# EAGLE board mixer2_old (EAGLE 7.3.0)
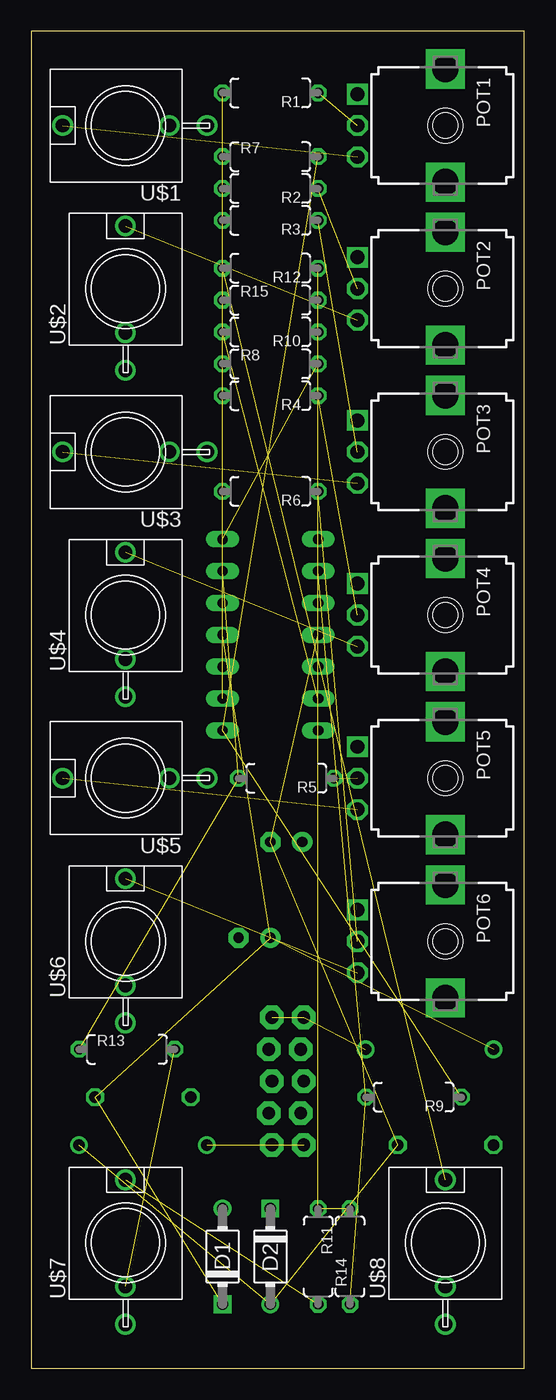
[diagram p0: board, top side]
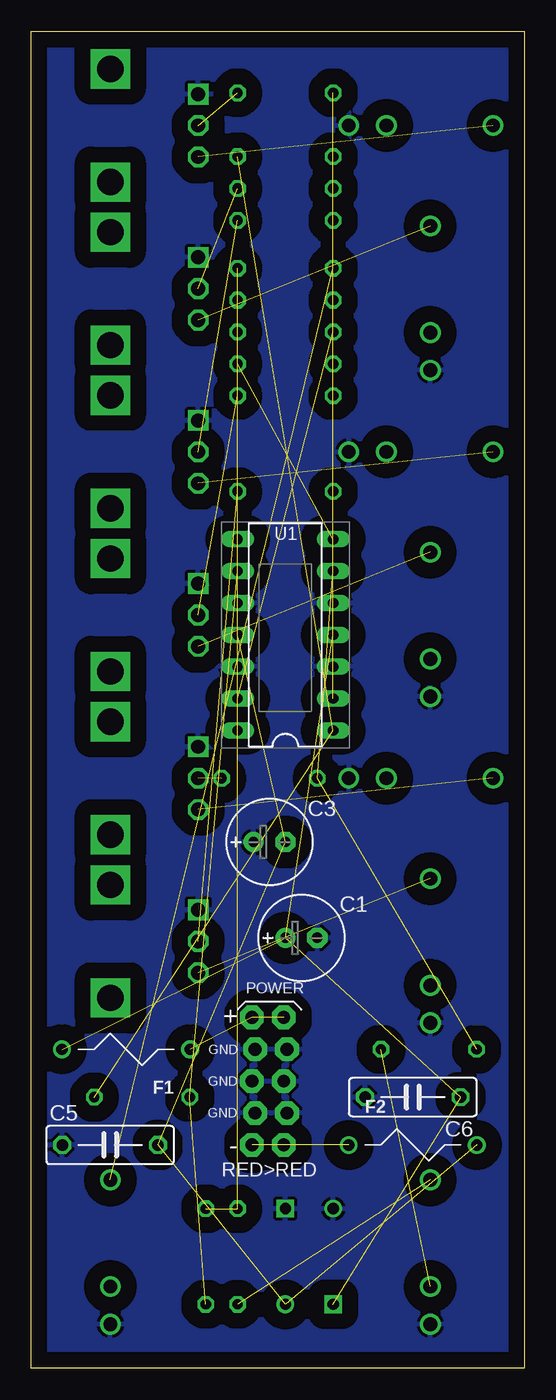
[diagram p1: board, bottom side, seen from below]

Size 39.3 x 106.5 mm. Coordinates in mm from the lower left corner, seen from the top.
Outline: 0,0 39.3,0 39.3,106.5 0,106.5 0,0
Copper layers (1*16): Top 0.035mm / dielectric 1.5mm / Bottom 0.035mm
Design rules "default": minimum track width 10mil, minimum drill 24mil, track to track 8mil, track to pad 8mil, pad to pad 8mil, via to via 8mil, smd to smd 8mil, copper to edge 40mil, drill to drill 8mil, minimum pad ring 10mil, minimum via ring 8mil, stop-mask expansion 4mil, vias tented up to drill 0mil, thermal gap 10mil

## Footprints (pad centres in the part's own frame; a part is rotated, then mirrored left to right if it is on the bottom)
E2,5-7 = drill 0.813 pad 1.6: + -1.27,0 | drill 0.813 pad 1.6 octagon: - 1.27,0
C075-032X103 = drill 0.914 octagon: 1 -3.81,0; 2 3.81,0
DO41-3 = drill 0.9: A 3.81,0 | drill 0.9 square: C -3.81,0
BOURNS-MF-R = drill 0.9: P$1 -5.105,0; P$2 5.105,0
9MM_SNAP-IN_POT = drill 1.1 square: 1 -2.5,-7 | drill 1.1 octagon: 2 0,-7; 3 2.5,-7 | drill 2.1 square: CHASSIS1 -4.5,0; CHASSIS2 4.5,0
7MM_RESISTOR = drill 0.813 octagon: 1 -3.81,0; 2 3.81,0
EURO_PWR_HEADER_LOCK = drill 1.016 pad 1.88 octagon: GND1 -2.54,1.143; GND2 -2.54,-1.397; GND3 0,1.397; GND4 0,-1.143; GND5 2.54,1.143; GND6 2.54,-1.397; NEG1 -5.08,1.397; NEG2 -5.08,-1.143; POS1 5.08,1.397; POS2 5.08,-1.143
DIL14 = drill 0.813 long: 1 -7.62,-3.81; 2 -5.08,-3.81; 3 -2.54,-3.81; 4 0,-3.81; 5 2.54,-3.81; 6 5.08,-3.81; 7 7.62,-3.81; 8 7.62,3.81; 9 5.08,3.81; 10 2.54,3.81; 11 0,3.81; 12 -2.54,3.81; 13 -5.08,3.81; 14 -7.62,3.81
WQP-PJ301M-12_JACK = drill 1.1: P$1_TIP 0,5; P$2_SWITCH 0,-3.5; P$3_SLEEVE 0,-6.5

## Placement (x,y rotation side)
C1  10uF  [E2,5-7]  17.78,34.29 0 bottom
C3  10uF  [E2,5-7]  20.32,41.91 0 bottom
C5  100nF  [C075-032X103]  33.02,17.78 0 bottom
C6  100nF  [C075-032X103]  8.89,21.59 180 bottom
D1  1N4007  [DO41-3]  15.24,8.89 90 top
D2  1N4007  [DO41-3]  19.05,8.89 270 top
F1  MF-R500+  [BOURNS-MF-R]  31.75,25.4 180 bottom
F2  MF-R500+  [BOURNS-MF-R]  8.89,17.78 0 bottom
POT1  A100K  [9MM_SNAP-IN_POT]  33,99 270 top
POT2  A100K  [9MM_SNAP-IN_POT]  33,86 270 top
POT3  A100K  [9MM_SNAP-IN_POT]  33,73 270 top
POT4  A100K  [9MM_SNAP-IN_POT]  33,60 270 top
POT5  A100K  [9MM_SNAP-IN_POT]  33,47 270 top
POT6  A100K  [9MM_SNAP-IN_POT]  33,34 270 top
R1  100K  [7MM_RESISTOR]  19.05,101.6 180 top
R2  100K  [7MM_RESISTOR]  19.05,93.98 180 top
R3  100K  [7MM_RESISTOR]  19.05,91.44 180 top
R4  100K  [7MM_RESISTOR]  19.05,77.47 180 top
R5  100K  [7MM_RESISTOR]  20.32,46.99 180 top
R6  100K  [7MM_RESISTOR]  19.05,69.85 180 top
R7  100K  [7MM_RESISTOR]  19.05,96.52 0 top
R8  100K  [7MM_RESISTOR]  19.05,80.01 0 top
R9  100K  [7MM_RESISTOR]  30.48,21.59 180 top
R10  100K  [7MM_RESISTOR]  19.05,82.55 180 top
R11  1K  [7MM_RESISTOR]  22.86,8.89 270 top
R12  1K  [7MM_RESISTOR]  19.05,87.63 180 top
R13  100K  [7MM_RESISTOR]  7.62,25.4 0 top
R14  100K  [7MM_RESISTOR]  25.4,8.89 90 top
R15  100K  [7MM_RESISTOR]  19.05,85.09 0 top
SV1  EURO_POWER_HEADERLOCK_PADS  [EURO_PWR_HEADER_LOCK]  20.32,22.86 90 bottom
U1  TL074_  [DIL14]  19.05,58.42 90 bottom
U$1  THONKICONNNEW  [WQP-PJ301M-12_JACK]  7.5,99 90 top
U$2  THONKICONNNEW  [WQP-PJ301M-12_JACK]  7.5,86 0 top
U$3  THONKICONNNEW  [WQP-PJ301M-12_JACK]  7.5,73 90 top
U$4  THONKICONNNEW  [WQP-PJ301M-12_JACK]  7.5,60 0 top
U$5  THONKICONNNEW  [WQP-PJ301M-12_JACK]  7.5,47 90 top
U$6  THONKICONNNEW  [WQP-PJ301M-12_JACK]  7.5,34 0 top
U$7  THONKICONNNEW  [WQP-PJ301M-12_JACK]  7.5,10 0 top
U$8  THONKICONNNEW  [WQP-PJ301M-12_JACK]  33,10 0 top

## Library data of the parts
C1 C3 C5 C6 = resistor
D1 D2 = gm-diodes
F1 F2 = ptc-littlefuse
POT1-POT6 R1-R15 SV1 U1 U$1-U$8 = MusicThingModular

## Nets
+12V: C1.+ C6.1 D1.C F1.P$2 U1.4
-12V: C3.- C5.2 D2.A F2.P$2 U1.11
GND: C1.- C3.+ C5.1 C6.2 D1.A D2.C POT1.1 POT2.1 POT3.1 POT4.1 POT5.1 POT6.1 SV1.GND1 SV1.GND2 SV1.GND3 SV1.GND4 SV1.GND5 SV1.GND6 U1.3 U1.5 U1.10 U1.12 U$1.P$3_SLEEVE U$2.P$3_SLEEVE U$3.P$3_SLEEVE U$4.P$3_SLEEVE U$5.P$3_SLEEVE U$6.P$3_SLEEVE U$7.P$3_SLEEVE U$8.P$3_SLEEVE
N$1: POT2.3 U$2.P$1_TIP
N$2: POT2.2 R2.1
N$3: POT1.3 U$1.P$1_TIP
N$4: POT1.2 R1.1
N$5: POT3.3 U$3.P$1_TIP
N$6: POT3.2 R3.1
N$7: POT4.3 U$4.P$1_TIP
N$8: POT4.2 R4.1
N$9: POT5.3 U$5.P$1_TIP
N$10: POT5.2 R5.1
N$11: POT6.3 U$6.P$1_TIP
N$12: POT6.2 R6.1
N$13: R1.2 R2.2 R3.2 R7.1 U1.2
N$15: R8.2 R10.1 U1.7
N$17: R9.2 R14.1 U1.9
N$18: R11.2 U$7.P$1_TIP
N$22: R12.1 R15.2 U1.14
N$23: R10.2 R15.1 U1.13
N$24: R4.2 R5.2 R6.2 R8.1 R13.1 U1.6
N$25: R11.1 R14.2 U1.8
N$26: R13.2 U$7.P$2_SWITCH
N$27: R12.2 U$8.P$1_TIP
N$28: R7.2 R9.1 U1.1
N$31: F2.P$1 SV1.NEG1 SV1.NEG2
N$32: F1.P$1 SV1.POS1 SV1.POS2

## Tracks (layer width: path | path; a pad name or v marks a point on that pad's centre or on a via)
+12V  (4 unrouted)
-12V  (4 unrouted)
GND
  pour Bottom (isolate 1.27): 0,107.95 -1.27,107.95 -1.27,-2.54 40.64,-2.54 40.64,107.95
N$1  (1 unrouted)
N$2  (1 unrouted)
N$3  (1 unrouted)
N$4  (1 unrouted)
N$5  (1 unrouted)
N$6  (1 unrouted)
N$7  (1 unrouted)
N$8  (1 unrouted)
N$9  (1 unrouted)
N$10  (1 unrouted)
N$11  (1 unrouted)
N$12  (1 unrouted)
N$13  (4 unrouted)
N$15  (2 unrouted)
N$17  (2 unrouted)
N$18  (1 unrouted)
N$22  (2 unrouted)
N$23  (2 unrouted)
N$24  (5 unrouted)
N$25  (2 unrouted)
N$26  (1 unrouted)
N$27  (1 unrouted)
N$28  (2 unrouted)
N$31  (2 unrouted)
N$32  (2 unrouted)